# Allegro board ex2_rlc.brd
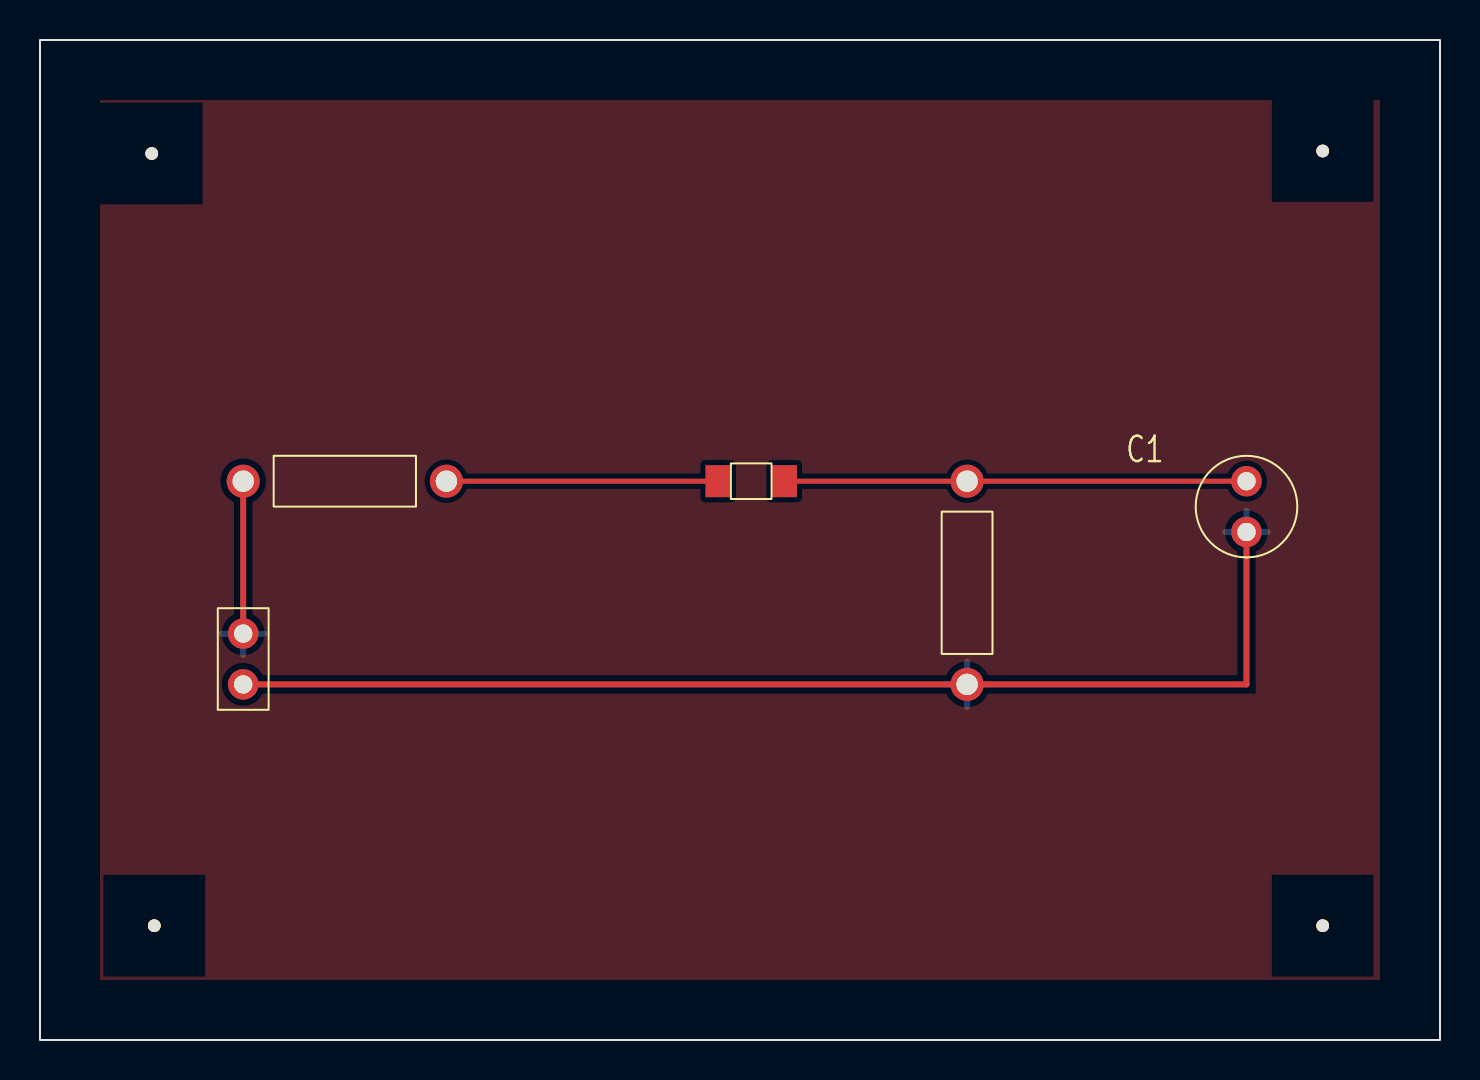
[diagram p0: board, top side]
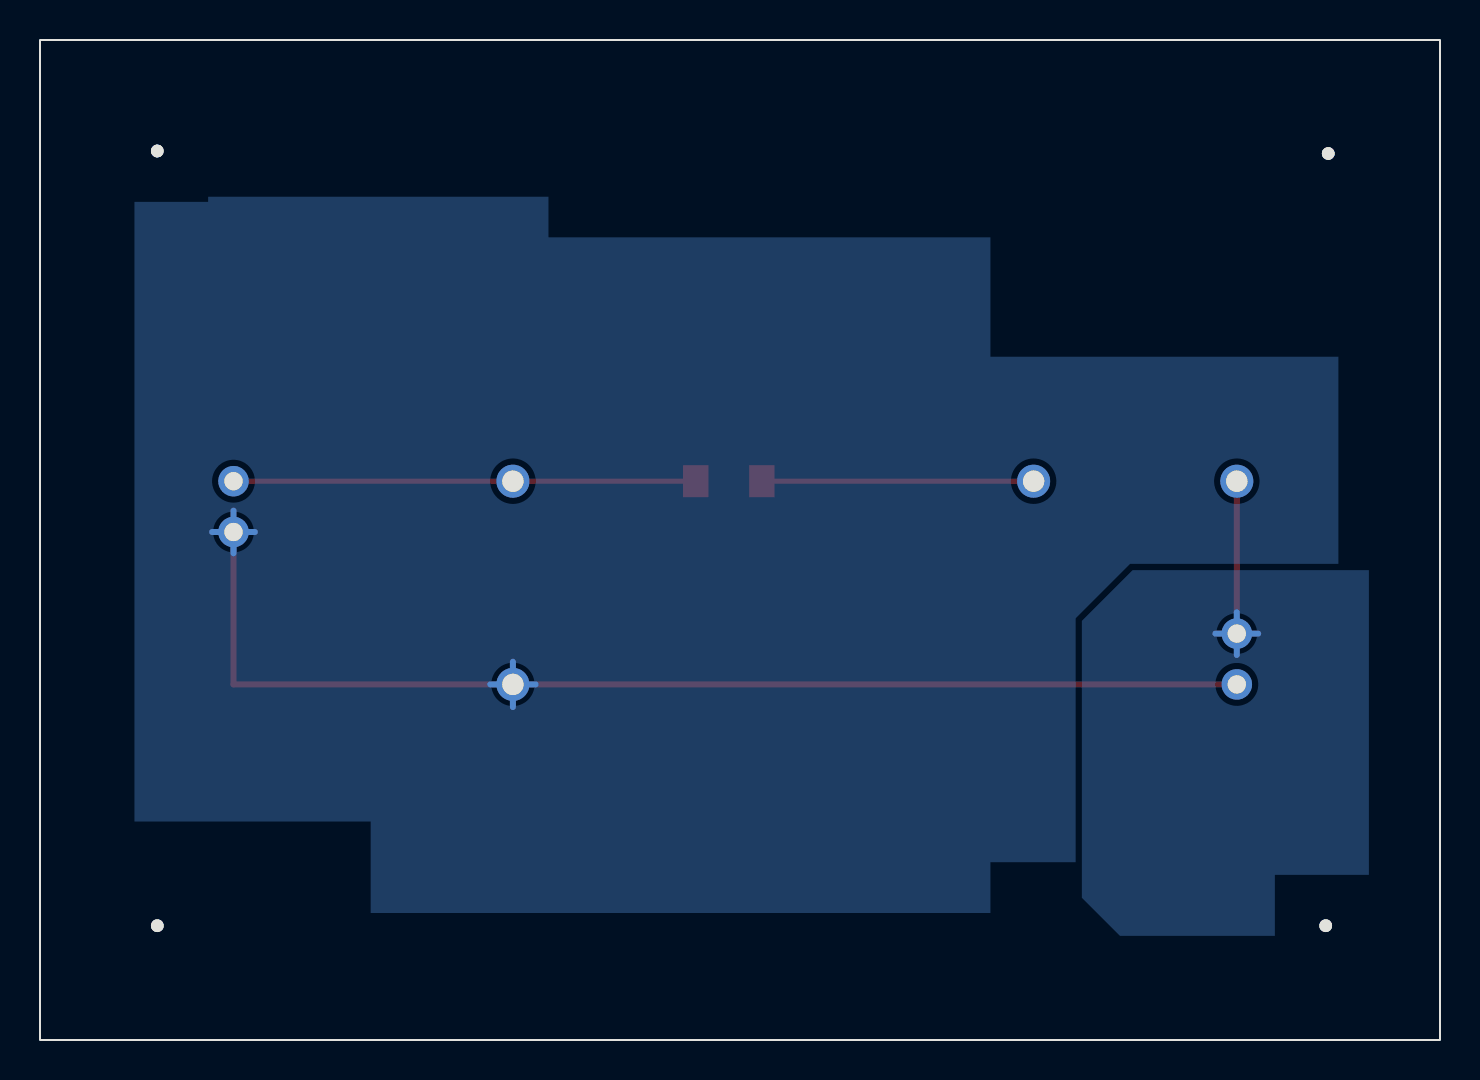
[diagram p1: board, bottom side, seen from below]

Outline 70 x 50 mm; copper layers: TOP, BOTTOM. Coordinates in mm from the lower left corner of the outline.
Outline path: rectangle 0,0 70,50

## Design rules (mm)
constraint set DEFAULT: min track width 0.254
net group BASENETS: nets KKK N00123

## Placement (name value [footprint] x y rotation side)
C1  1u  [CAP196]  60.33 25.4 0 top
J1  CON2  [JUMPER2]  10.16 20.32 270 top
L1  100n  [SMDRES]  35.56 27.94 0 top
NOREF  -  [unnamed]  64.14 44.45 0 top
NOREF#2  -  [unnamed]  64.14 5.71 0 top
NOREF#3  -  [unnamed]  5.59 44.32 0 top
NOREF#4  -  [unnamed]  5.71 5.71 0 top
R1  330  [RES400]  10.16 27.94 270 top
R2  330  [RES400]  46.35 27.94 180 top

## Library data of the parts
C1 = CAP NP: Tolerance: ***; User Part Number: ***
J1 = CON2: User Part Number: ***
L1 = INDUCTOR: Tolerance: ***; User Part Number: ***
R1 R2 = R: Tolerance: ***; User Part Number: ***

## Footprints (pads in the part's own frame, mm; a bottom-side part is the same pattern mirrored in y, then rotated)
CAP196
  round 1.524 hole 0.914: 1(0,0) 2(0,2.54)
JUMPER2
  round 1.524 hole 0.914: 1(0,0) 2(2.54,0)
RES400
  round 1.651 hole 1.067: 1(0,0) 2(0,10.16)
SMDRES
  rect 1.27x1.6 smd: 1(-1.651,0) 2(1.651,0)
unnamed
  round 0.635 hole 3.175 unplated: (0,0)

## Nets
GND: C1.1 J1.2 R2.2
VCC: J1.1 R1.1
KKK: L1.1 R1.2
N00123: C1.2 L1.2 R2.1

## Routing (per net, layer and track width the routed paths; a pad name or vN(x,y) marks a point on that pad's centre or on a via; arc(x,y) is an arc through that point)
GND: length 66.6
  TOP w0.3: J1.2 R2.2 60.33,17.78 C1.1
  BOTTOM w0.3: 60.33,24.33 C1.1 ; C1.1 59.26,25.4 ; C1.1 61.39,25.4 ; C1.1 60.33,26.47 ; R2.2 46.35,18.91 ; R2.2 46.35,16.65 ; R2.2 45.22,17.78 ; R2.2 47.49,17.78
VCC: length 11.9
  TOP w0.3: R1.1 J1.1
  BOTTOM w0.3: J1.1 10.16,21.39 ; J1.1 10.16,19.25 ; J1.1 9.09,20.32 ; J1.1 11.23,20.32
KKK: length 13.6
  TOP w0.254: L1.1 R1.2
N00123: length 23.1
  TOP w0.254: L1.2 R2.1 C1.2

## Copper pours and planes (outline as drawn; the poured copper is in the pictures)
GND on BOTTOM: 44.58,42.16 65.28,42.16 65.28,10.92 53.47,10.92 53.47,6.35 22.48,6.35 22.48,8.89 5.08,8.89 5.08,34.16 22.48,34.16 22.48,40.13 44.58,40.13
VCC on BOTTOM: 3.56,23.5 15.37,23.5 17.91,20.95 17.91,7.11 16,5.21 4.7,5.21 3.56,6.35
Net_1 on TOP: 3,3 3,47 67,47 67,3

## Text on the board
TOLERANCE_TOP: FIGURE | FINISHED_SIZE | 0.914 | 1.067 | 3.175 | DRILL CHART: TOP to BOTTOM | ALL UNITS ARE IN MILLIMETERS | PLATED | NON-PLATED | QTY | 4
